# Altium PCB Holiday r2.PcbDoc (part 3 of 3)
Units mil, origin at the board's own origin, x right, y up, seen from the top; angles counter-clockwise.
Board outline 2637.8 x 2637.8 mil, 4 copper layers (Top Layer, Mid-Layer 1, InternalPlane1, Bottom Layer), stack 63.08 mil thick; 132 components, 142 nets, 636 pads, 407 vias.
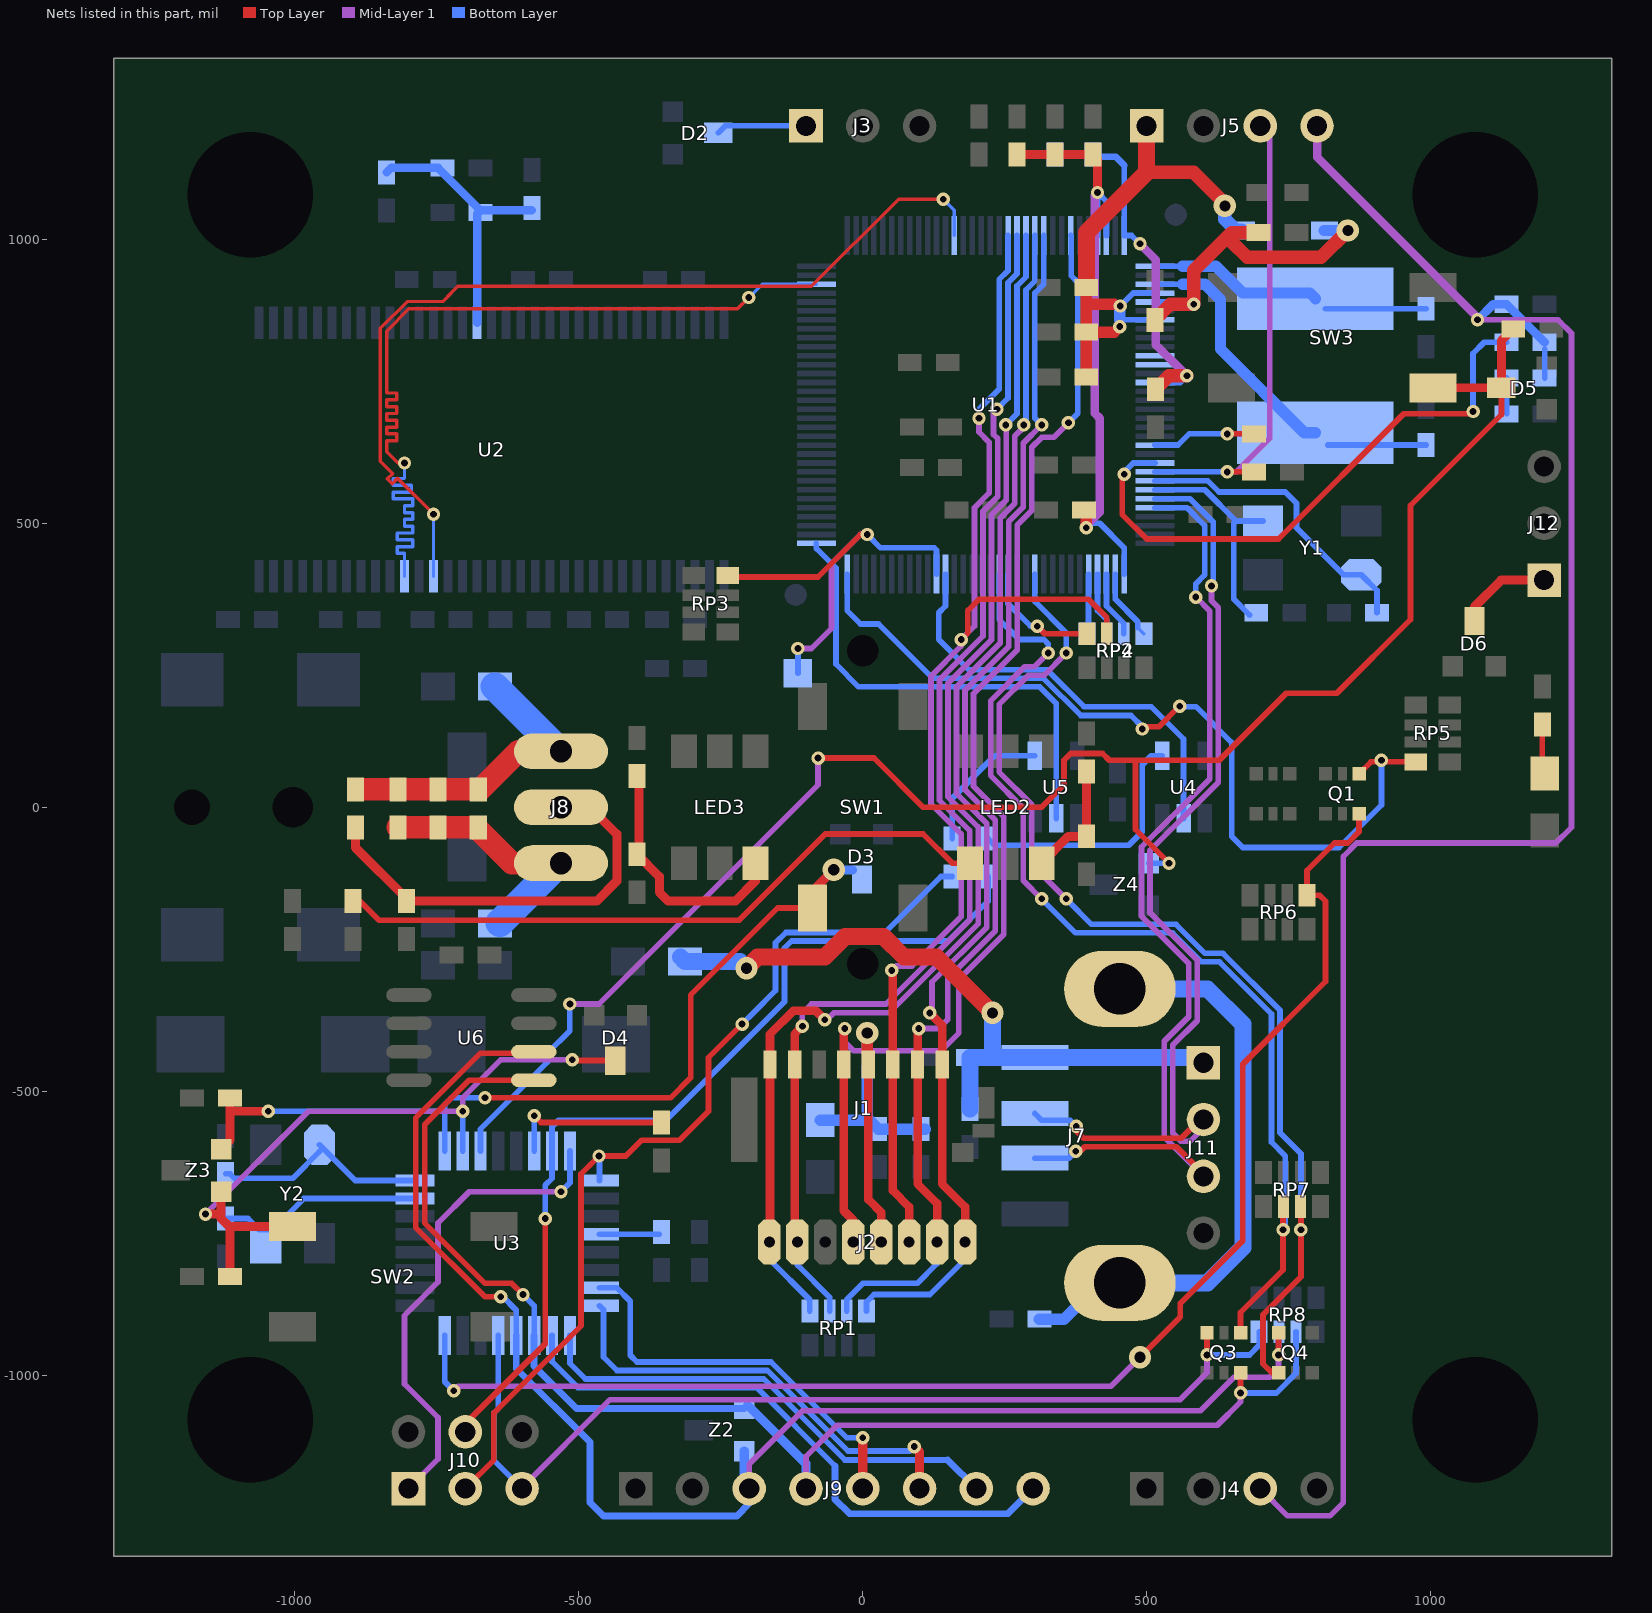
[diagram p5: the nets of this part, all layers, seen from the top]

## Via types
v1: diameter 23.62, hole 11.81, Top Layer to Bottom Layer, tented both sides, 373 vias
v2: diameter 39.37, hole 19.68, Top Layer to Bottom Layer, tented both sides, 33 vias
v3: diameter 35.43, hole 19.68, Top Layer to Bottom Layer, tented both sides, 1 vias

## Nets (pads, with @x,y where several pads share a name; then routed paths per layer and width w, separated by ;. In a path a pad name is that pad's centre, name@x,y a point inside that pad or via, vN(x,y) a via of type N, cw(c..) or ccw(c..) an arc to the next point about the centre after c; other vN are vias at no path point) (continued)
LCD_D00: RP2.4.1 U1.2 | length 125.6
  Bottom Layer w6: RP2.4.1@484.25,316.22 RP2.4.1@494.88,305.59
  Bottom Layer w10: U1.2@444.88,410.43 444.88,366.14 484.25,326.77 RP2.4.1@484.25,316.22
LCD_D01: RP2.3.1 U1.3 | length 117.6
  Bottom Layer w10: U1.3@429.13,410.43 429.13,354.33 459.88,323.58 RP2.3.1@459.88,305.59
LCD_D02: RP2.2.1 U1.4 | length 111.7
  Bottom Layer w10: U1.4@413.39,410.43 413.39,346.46 429.88,329.96 RP2.2.1@429.88,305.59
LCD_D03: RP2.1.1 U1.5 | length 106
  Bottom Layer w6: RP2.1.1@394.88,305.59 RP2.1.1@397.64,308.35
  Bottom Layer w10: RP2.1.1@397.64,308.35 U1.5@397.64,410.43
LCD_RS: RP4.4.1 U1.14 | length 213
  Top Layer w10: v1(307.09,318.9) 320.39,305.59 RP4.4.1@394.88,305.59
  Bottom Layer w10: U1.14@255.91,410.43 255.91,358.27 295.28,318.9 v1(307.09,318.9)
LRADC0: U1.108
LRADC1: U1.107
MISO: RP3.4.1 TP1.1 U1.22 | length 768.9
  Top Layer w10: RP3.4.1@-237.72,408.27 -234.96,405.51 -78.74,405.51 -3.94,480.32 v1(7.87,480.32)
  Mid-Layer 1 w10: v1(-114.17,279.53) -90.55,279.53 -55.12,314.96 -55.12,429.13 -3.94,480.32 v1(7.87,480.32)
  Bottom Layer w10: TP1.1@-114.17,236.22 v1(-114.17,279.53) ; v1(7.87,480.32) 31.5,456.69 125.98,456.69 129.92,452.76 U1.22@129.92,410.43
MISO_5V: J10.1 U3.16 | length 866.1
  Mid-Layer 1 w10: J10.1@-800,-1200 -748.03,-1148.03 -748.03,-1074.8 -807.09,-1015.75 -807.09,-895.28 -748.03,-836.22 -748.03,-732.28 -692.91,-677.17 v1(-531.5,-677.17)
  Bottom Layer w10: J10.1@-800,-1200 J10.1@-800,-1189.76 ; v1(-531.5,-677.17) -515.75,-661.42 U3.16@-515.75,-605.32
MOSI: U1.21 U4.2 | length 763.5
  Bottom Layer w10: U1.21@145.67,410.43 145.67,354.33 133.86,342.52 133.86,295.28 145.67,283.46 187.17,241.97 324.96,241.97 389.76,177.17 507.87,177.17 564.96,120.08 U4.2@564.96,-19.69
MOSI_5V: J10.4 R13.1 U3.15 | length 1631.4
  Top Layer w10: J10.4@-700,-1100 -700,-1085.83 -559.06,-944.88 v1(-559.06,-724.41)
  Bottom Layer w10: v1(-559.06,-724.41) -559.06,-665.35 -547.24,-653.54 U3.15@-547.24,-605.32 -547.24,-562.99 -535.43,-551.18 -346.46,-551.18 -137.8,-342.52 -137.8,-248.03 -125.24,-235.47 150.35,-235.47 220.47,-165.35 R13.1@220.47,-122.05
NetC21_1: C21.1 L1.1 U1.97 | length 473.5
  Bottom Layer w10: U1.97@524.61,952.76 562.99,952.76 ; L1.1@814.96,877.95 C21.1@992.13,877.95
  Bottom Layer w20: 562.99,952.76 622.05,952.76 669.29,905.51 787.4,905.51 L1.1@797.24,895.67
NetC30_1: C30.1 L1.2 U1.99 | length 611
  Bottom Layer w10: U1.99@518.7,921.26 562.99,921.26 ; L1.2@818.9,637.8 C30.1@992.13,637.8
  Bottom Layer w20: 562.99,921.26 602.36,921.26 629.92,893.7 629.92,807.09 777.56,659.45 L1.2@797.24,659.45
NetC33_1: C33.1 U1.122 Y1.3 | length 391.2
  Bottom Layer w10: U1.122@514.76,559.06 602.36,559.06 657.48,503.94 ; C33.1@681.1,338.58 653.54,366.14 653.54,381.89 653.54,500 657.48,503.94 ; Y1.3@704.73,503.94 657.48,503.94
NetC34_2: C34.2 C36.1 R4.1 R5.1 U2.49 | length 490.4
  Bottom Layer w15: R4.1@-838.58,1118.11 -830.71,1125.98 -748.03,1125.98 C34.2@-673.25,1051.2 ; U2.49@-679.13,853.35 -679.13,1045.31 C34.2@-673.25,1051.2 ; C36.1@-582.68,1051.2 C34.2@-673.25,1051.2
NetC35_1: C35.1 U1.121 Y1.1 | length 535.4
  Bottom Layer w10: U1.121@514.76,574.8 607.83,574.8 627.51,555.12 744.09,555.12 763.78,535.43 763.78,492.13 846.46,409.45 Y1.1@877.95,409.45 905.51,381.89 C35.1@905.51,342.52
NetC37_1: C37.1 U1.117 | length 182.4
  Top Layer w10: v1(641.73,657.48) C37.1@688.98,657.48
  Bottom Layer w10: U1.117@514.76,637.8 555.12,637.8 574.8,657.48 v1(641.73,657.48)
NetC41_1: C41.1 R6.1 | length 63
  Bottom Layer w10: C41.1@1133.86,692.91 R6.1@1133.86,755.91
NetC42_1: C42.1 U3.8 Y2.1 | length 382.6
  Bottom Layer w10: C42.1@-1122.05,-645.67 -1114.17,-645.67 -1106.3,-653.54 -1003.94,-653.54 Y2.1@-956.69,-606.3 ; Y2.1@-956.69,-594.49 -893.7,-657.48 U3.8@-788.39,-657.48
NetC43_1: C43.1 U3.7 Y2.3 | length 364.6
  Bottom Layer w10: C43.1@-1122.05,-724.41 -1082.68,-724.41 -1062.99,-744.09 -1039.37,-744.09 -984.25,-688.98 U3.7@-788.39,-688.98
NetC44_1: C44.1 U3.20 | length 105.3
  Bottom Layer w10: U3.20@-463.58,-751.97 C44.1@-358.27,-751.97
NetC45_1: C45.1 C46.1 J7.1 J11.1 L3.2 | length 1216.4
  Top Layer w30: v2(-204.72,-283.46) -185.04,-263.78 -66.93,-263.78 -31.18,-228.03 36.8,-228.03 72.55,-263.78 129.92,-263.78 v2(228.35,-362.2)
  Bottom Layer w30: L3.2@-321.26,-263.78 L3.2@-313.39,-271.65 -216.53,-271.65 v2(-204.72,-283.46) ; C45.1@188.98,-531.5 C46.1@188.98,-444.88 ; C46.1@188.98,-440.95 228.35,-440.95 ; v2(228.35,-362.2) 228.35,-440.95 ; J11.1@600,-450 590.95,-440.95 J7.1@303.15,-440.95 228.35,-440.95
NetC47_1: C47.1 C52.2 C53.2 C54.1 J8.3 L7.2 | length 545.9
  Top Layer w40: C54.1@-885.83,31.48 -692.93,31.48 ; -692.91,31.5 C47.1@-677.17,31.5 -673.23,31.5 -606.3,98.42 J8.3@-531.5,98.42
  Bottom Layer w50: L7.2@-648.03,212.6 -533.86,98.42 J8.3@-531.5,98.42
NetC47_2: C47.2 C52.1 C53.1 J8.1 L5.2 | length 464.5
  Top Layer w40: C53.1@-818.9,-35.42 -681.12,-35.42 -618.11,-98.43 J8.1@-531.5,-98.43
  Bottom Layer w50: L5.2@-638.98,-203.54 -533.86,-98.43 J8.1@-531.5,-98.43
NetC49_2: C49.2 LED3.3 R10.1 | length 444.6
  Top Layer w16: C49.2@-397.64,-82.69 -358.27,-122.06 -358.27,-149.61 -342.52,-165.35 -224.41,-165.35 -188.98,-129.92 LED3.3@-188.98,-98.43 ; R10.1@-397.64,55.12 -393.72,51.2 C49.2@-393.72,-82.69
NetC54_2: C54.2 J8.2 L6.2 | length 752.9
  Top Layer w16: C54.2@-893.7,-35.43 -893.7,-70.86 -803.15,-161.42 L6.2@-803.15,-165.37 -468.52,-165.37 -433.07,-129.92 -433.07,-47.24 -480.32,0 J8.2@-531.5,0
NetC55_2: C55.2 LED2.3 R11.1 | length 212.5
  Top Layer w16: LED2.3@314.96,-98.43 362.19,-51.2 C55.2@393.7,-51.2 R11.1@393.7,62.99
NetD2_2: D2.3 J3.1 | length 184.2
  Top Layer w10: J3.1@-100,1200 J3.1@-75.59,1200
  Bottom Layer w10: D2.3@-254.64,1187.61 -242.25,1200 J3.1@-100,1200
NetD6_2: D6.3 J12.1 | length 167
  Top Layer w16: D6.3@1077.37,328.03 1077.37,352.96 1124.41,400 J12.1@1200,400
NetJ7_G1: J7.G1 J7.G2 L4.2 | length 1046.4
  Bottom Layer w20: L4.2@311.01,-901.57 354.33,-901.57 418.31,-837.6 J7.G2@452.76,-837.6
  Bottom Layer w30: J7.G2@452.76,-837.6 607.28,-837.6 669.29,-775.59 669.29,-381.89 607.28,-319.88 J7.G1@452.76,-319.88
NetJ9_5: J9.5 U3.23 | length 718.3
  Top Layer w15.98: J9.5@0,-1200 v1(0,-1110.24)
  Bottom Layer w10: U3.23@-463.58,-846.46 -433.07,-846.46 -409.45,-870.08 -409.45,-965.12 -397.64,-976.93 -161.75,-976.93 -28.44,-1110.24 v1(0,-1110.24)
NetJ9_6: J9.6 U3.24 | length 790.2
  Top Layer w15.98: v1(90.55,-1125.98) 100,-1135.43 J9.6@100,-1200
  Bottom Layer w10: U3.24@-463.58,-877.95 -456.69,-884.84 -456.69,-968.31 -433.07,-991.93 -167.96,-991.93 -26.03,-1133.86 82.68,-1133.86 v1(90.55,-1125.98)
NetJ9_7: J9.7 U3.25 | length 856.4
  Bottom Layer w10: U3.25@-515.75,-930.12 -515.75,-979.37 -488.19,-1006.93 -174.17,-1006.93 -31.5,-1149.61 149.61,-1149.61
  Bottom Layer w12: 149.61,-1149.61 J9.7@200,-1200
NetJ9_8: J9.8 U3.26 | length 1057.3
  Bottom Layer w10: U3.26@-547.24,-930.12 -547.24,-976.38 -501.69,-1021.93 -186.73,-1021.93 -48.77,-1159.89
  Bottom Layer w12: -23.62,-1244.09 255.91,-1244.09 J9.8@300,-1200
  Bottom Layer w12.01: -48.77,-1159.89 -48.77,-1218.94 -23.62,-1244.09
NetLED1_A: LED1.A R1.1 | length 88.2
  Top Layer w10: R1.1@1196.85,145.67 1196.85,62.99 LED1.A@1200.79,59.05
NetLED2_1: LED2.1 R15.2 | length 1184.7
  Top Layer w10: R15.2@-897.64,-165.35 -885.83,-165.35 -852.08,-199.1 -217.79,-199.1 -65.93,-47.24 106.3,-47.24 157.48,-98.43 LED2.1@188.98,-98.43
NetR8_1: R8.1 U1.119 | length 1045.8
  Top Layer w10: v1@456.69,586.61 456.69,515.75 500,472.44 732.28,472.44 952.76,692.91 v1@1074.8,692.91
  Mid-Layer 1 w10: v1@456.69,586.61 v1(460.63,586.61) ; v1@1074.8,692.91 v1(1074.8,696.85)
  Bottom Layer w10: v1(460.63,586.61) 456.69,586.61 476.38,606.3 U1.119@514.76,606.3 ; v1(1074.8,696.85) 1074.8,799.21 1094.49,818.9 R8.1@1133.86,818.9
NetR12_2: R12.2 U3.14 | length 291.3
  Top Layer w10: v1(-578.74,-543.31) -566.91,-555.14 R12.2@-354.33,-555.14
  Bottom Layer w10: U3.14@-578.74,-605.32 v1(-578.74,-543.31)
NetR13_2: R13.2 U4.4 | length 446.4
  Bottom Layer w10: R13.2@220.47,-55.14 232.27,-66.93 468.5,-66.93 492.13,-43.31 492.13,74.8 507.87,90.55 U4.4@527.56,90.55
NetR14_2: R14.2 U5.4 | length 247.5
  Bottom Layer w10: R14.2@157.48,-55.14 157.48,15.75 232.28,90.55 U5.4@303.15,90.55
PB1_5V: C58.2 D3.3 SW1.1 U3.9 Z3.2 | length 1548.7
  Top Layer w10: v1(-665.35,-511.81) -338.58,-511.81 -303.15,-476.38 -303.15,-330.71 -150,-177.56 SW1.1@-88.19,-177.56
  Top Layer w15.75: Z3.2@-1129.92,-602.16 -1114.19,-586.43 -1114.19,-535.43 ; C58.2@-1114.19,-511.81 -1114.19,-535.43 ; v1(-1047.24,-535.43) -1114.19,-535.43
  Top Layer w16: SW1.1@-88.19,-177.56 -88.19,-147.24 v2(-51.18,-110.24)
  Bottom Layer w10: v1(-1047.24,-535.43) -736.22,-535.43 ; U3.9@-736.22,-605.32 -736.22,-535.43 ; v1(-665.35,-511.81) -724.41,-511.81 -736.22,-523.62 -736.22,-535.43
  Bottom Layer w16: v2(-51.18,-110.24) D3.3@-18.38,-110.24
PB2_5V: C59.2 D4.3 SW2.1 U3.10 Z3.1 | length 1212.1
  Top Layer w10: v1(-511.81,-444.88) -510.55,-446.14 D4.3@-435.64,-446.14
  Top Layer w15.75: v1(-1157.48,-716.54) -1129.92,-716.54
  Top Layer w15.98: Z3.1@-1129.92,-677.16 -1129.92,-716.54 -1129.92,-724.41 -1114.19,-740.14 C59.2@-1114.19,-826.77 ; -1114.19,-738.58 SW2.1@-1004.33,-738.58
  Mid-Layer 1 w10: v1(-1157.48,-716.54) -976.38,-535.43 v1(-704.72,-535.43) -704.72,-511.81 -637.79,-444.88 v1(-511.81,-444.88)
  Bottom Layer w10: U3.10@-704.73,-605.32 v1(-704.72,-535.43)
PB3_5V: C60.2 D5.3 SW3.1 U3.11 Z4.1 | length 3167.8
  Top Layer w10: v1(-78.74,86.61) 19.68,86.61 106.3,0 314.96,0 354.33,39.37 354.33,82.68 366.14,94.49 422.24,94.49 434.06,82.68 480.32,82.68 ; v1(539.37,-98.43) 480.32,-39.37 480.32,82.68 ; SW3.1@1004.33,738.58 SW3.1@1004.54,738.79 ; D5.3@1124.73,738.79 1124.73,691.65 964.57,531.5 964.57,330.71 834.65,200.79 745.79,200.79 627.68,82.68 480.32,82.68
  Top Layer w15.75: SW3.1@1004.54,738.79 D5.3@1124.73,738.79 1124.73,821.56 C60.2@1145.69,842.52
  Mid-Layer 1 w10: v1(-515.75,-346.46) -464.57,-346.46 -78.74,39.37 v1(-78.74,86.61)
  Bottom Layer w10: U3.11@-673.23,-605.32 -673.23,-566.93 -555.12,-448.82 -555.12,-433.07 -515.75,-393.7 v1(-515.75,-346.46) ; Z4.1@503.94,-98.43 v1(539.37,-98.43)
PSWITCH: J4.3 J5.4 R6.2 R7.2 R8.2 | length 3448
  Top Layer w15: J5.4@800,1180.31 J5.4@800,1200
  Mid-Layer 1 w10: J4.3@700,-1200 748.03,-1248.03 822.83,-1248.03 846.46,-1224.41 846.46,-86.61 870.08,-62.99 1220.47,-62.99 1248.03,-35.43 1248.03,834.65 1224.41,858.27 v1@1086.61,858.27
  Mid-Layer 1 w15: J5.4@800,1180.31 800,1144.88 1082.68,862.2 v1(1082.68,858.27) ; v1@1084.65,860.24 v1@1086.61,858.27
  Bottom Layer w10: R6.2@1200.77,755.91 R8.2@1200.77,807.1
  Bottom Layer w15: v1(1082.68,858.27) 1110.2,885.79 R7.2@1133.88,885.83 R8.2@1200.77,818.9
RAS_N: U1.62 U2.23 | length 1660.8
  Top Layer w6: v1(-807.09,606.3) -818.9,606.3 -838.58,625.98 -838.58,645.46 -820.38,645.46 -820.38,657.46 -838.58,657.46 -838.58,669.46 -820.38,669.46 -820.38,681.46 -838.58,681.46 -838.58,693.46 -820.38,693.46 -820.38,705.46 -838.58,705.46 -838.58,717.46 -820.38,717.46 -820.38,729.46 -838.58,729.46 -838.58,838.58 -799.21,877.95 -713.06,877.95 -712.93,877.83 -220.6,877.83 v1(-200.79,897.64)
  Bottom Layer w6: U2.23@-807.09,406.5 -807.09,446.94 -819.71,446.94 -819.71,458.94 -792.49,458.94 -792.49,470.94 -819.71,470.94 -819.71,482.94 -792.49,482.94 -792.49,494.94 -807.09,494.94 -807.09,506.94 -792.49,506.94 -792.49,518.94 -807.09,518.94 -807.09,530.94 -792.49,530.94 -792.49,542.94 -827.09,542.94 -827.09,554.94 -794.76,554.94 -794.76,566.94 -827.09,566.94 -827.09,578.94 -807.09,578.94 v1(-807.09,606.3) ; v1(-200.79,897.64) -177.17,921.26 U1.62@-81.69,921.26
RESET_N: J10.5 Q3.3 RP8.4.1 U3.29 | length 1778.5
  Top Layer w10: v1(606.3,-964.57) Q3.3@606.3,-925.2
  Mid-Layer 1 w10: J10.5@-600.79,-1199.21 -444.88,-1043.31 559.06,-1043.31 606.3,-996.06 v1(606.3,-964.57)
  Bottom Layer w10: U3.29@-641.73,-930.12 -641.73,-1059.06 -649.61,-1066.93 -649.61,-1150.39 J10.5@-600,-1200 ; v1(606.3,-964.57) 681.1,-964.57 698.03,-947.64 RP8.4.1@698.03,-923.7
SCK: U1.33 U5.2 | length 846
  Bottom Layer w10: U1.33@-81.69,464.57 -81.69,455.71 -47.24,421.26 -47.24,251.97 -7.24,211.97 311.65,211.97 340.55,183.07 U5.2@340.55,-19.69
SCK_5V: J10.3 R14.1 U3.17 | length 1656.2
  Top Layer w10: J10.3@-700,-1200 -649.61,-1149.61 -649.61,-1066.93 -496.06,-913.39 -496.06,-645.67 -480.31,-629.92 v1(-464.57,-614.17) -417.32,-614.17 -389.76,-586.61 -322.83,-586.61 -271.65,-535.43 -271.65,-440.94 v1(-212.6,-381.89)
  Bottom Layer w10: U3.17@-463.58,-657.48 v1@-463.58,-615.16 ; v1(-212.6,-381.89) -192.91,-362.2 -153.54,-322.83 -153.54,-238.63 -135.39,-220.47 39.37,-220.47 137.8,-122.05 R14.1@157.48,-122.05
SCL: Q4.4 RP7.3.1 U1.11 | length 1906.3
  Top Layer w10: Q4.4@732.28,-996.06 720.47,-996.06 704.72,-980.31 704.72,-893.7 771.65,-826.77 v1(771.65,-744.09) RP7.3.1@771.65,-703.98
  Mid-Layer 1 w10: v1(358.27,-161.42) 297.72,-100.87 297.72,4.55 240.16,62.11 240.16,181.1 291.32,232.27 318.88,232.27 v1(358.27,271.65)
  Bottom Layer w10: U1.11@303.15,410.43 303.15,362.21 358.27,307.09 v1(358.27,271.65) ; v1(358.27,-161.42) 403.07,-206.22 551.8,-206.22 602.98,-257.4 634.47,-257.4 734.72,-357.65 734.72,-573.31 771.65,-610.24 v1(771.65,-744.09)
SCL_5V: J9.3 Q4.3 RP8.3.1 U3.28 U6.6 Z2.2 | length 2623.8
  Top Layer w10: v1(-637.8,-862.2) -665.35,-862.2 -787.4,-740.16 -787.4,-547.24 -673.23,-433.07 -581.57,-433.07 U6.6@-579.21,-430.71 ; v1(732.28,-964.57) Q4.3@732.28,-925.2
  Mid-Layer 1 w10: J9.3@-200,-1200 -200,-1156.69 -106.3,-1062.99 594.49,-1062.99 653.54,-1003.94 716.54,-1003.94 732.28,-988.19 v1(732.28,-964.57)
  Bottom Layer w10: v1(-637.8,-862.2) -633.86,-862.2 -610.24,-885.83 U3.28@-610.24,-930.12 ; v1(732.28,-964.57) 733.03,-963.82 RP8.3.1@733.03,-923.7
  Bottom Layer w12: U3.28@-610.24,-930.12 -610.24,-988.19 -480.31,-1118.11 ; -456.69,-1248.03 -221.65,-1248.03 -200,-1226.38 J9.3@-200,-1200
  Bottom Layer w12.01: -480.31,-1118.11 -480.31,-1224.41 -456.69,-1248.03
  Bottom Layer w15.98: Z2.2@-208.66,-1134.05 -208.66,-1191.34 J9.3@-200,-1200
SD_VCC: C39.1 C40.1 J1.4 J2.4 L2.1 | length 725
  Top Layer w15: J1.4@9.84,-452.76 9.84,-690.94 32.48,-713.58 J2.4@32.48,-765.75
  Top Layer w20: v2(7.87,-397.64) 7.87,-450.79 J1.4@9.84,-452.76
  Bottom Layer w20: L2.1@-74.8,-551.18 11.81,-551.18 ; v2(7.87,-397.64) 7.87,-547.24 11.81,-551.18 ; C40.1@110.24,-566.93 C40.1@102.36,-566.93 C39.1@27.56,-566.93 11.81,-551.18
SDA: Q3.1 RP7.2.1 U1.15 | length 1856.3
  Top Layer w10: Q3.1@665.36,-925.2 665.36,-889.76 740.16,-814.96 v1(740.16,-744.09) 740.16,-703.98 RP7.2.1@740.91,-703.23
  Mid-Layer 1 w10: v1(314.96,-161.42) 282.72,-129.17 282.72,-1.66 225.16,55.9 225.16,187.32 285.11,247.27 302.39,247.27 v1(326.77,271.65)
  Bottom Layer w10: U1.15@240.16,410.43 240.16,330.71 275.59,295.28 318.9,295.28 326.77,287.4 v1(326.77,271.65) ; v1(314.96,-161.42) 374.76,-221.22 545.58,-221.22 596.76,-272.4 628.26,-272.4 719.72,-363.87 719.72,-589.8 744.09,-614.17 744.09,-740.16 v1(740.16,-744.09)
SDA_5V: J9.4 Q3.6 RP8.2.1 U3.27 U6.5 Z2.1 | length 2446.3
  Top Layer w10: v1(-598.43,-858.27) -618.11,-838.58 -665.35,-838.58 -771.65,-732.28 -771.65,-559.06 -693.31,-480.71 U6.5@-579.21,-480.71 ; v1(665.35,-1031.5) Q3.6@665.36,-996.06
  Mid-Layer 1 w10: J9.4@-100,-1200 -100,-1143.31 -45.12,-1088.43 624.17,-1088.43 665.35,-1047.24 v1(665.35,-1031.5)
  Bottom Layer w10: v1(-598.43,-858.27) -578.74,-877.95 U3.27@-578.74,-930.12 ; v1(665.35,-1031.5) 728.35,-1031.5 763.03,-996.81 RP8.2.1@763.03,-923.7
  Bottom Layer w12: U3.27@-578.74,-930.12 -578.74,-984.25 -503.94,-1059.05 Z2.1@-208.66,-1059.05
  Bottom Layer w15.98: Z2.1@-202.76,-1053.15 -100,-1155.91 J9.4@-100,-1200
SS: Q1.1 RP5.4.1 U1.32 | length 1528.5
  Top Layer w10: v1(492.12,137.8) 496.06,141.73 521.73,141.73 v1(558,178) ; Q1.1@874.02,59.06 894.88,79.92 RP5.4.1@973.94,79.92
  Bottom Layer w10: U1.32@-27.56,410.43 -27.56,346.46 -3.94,322.83 27.56,322.83 123.43,226.97 318.55,226.97 384.1,161.42 472.44,161.42 492.12,141.73 v1(492.12,137.8) ; v1(558,178) 558.83,177.17 586.61,177.17 649.61,114.17 649.61,-51.18 669.29,-70.87 838.58,-70.87 913.39,3.94 v1(913.39,82.68)
SS_5V: Q1.6 RP6.1.1 U3.32 | length 2507.6
  Top Layer w10: v2(488.19,-968.5) 559.06,-897.64 559.06,-873.72 669.29,-763.48 669.29,-452.76 814.96,-307.09 814.96,-165.35 804.65,-155.04 RP6.1.1@782.28,-155.04 782.28,-111.42 830.71,-62.99 854.33,-62.99 874.02,-43.31 Q1.6@874.02,-11.81
  Mid-Layer 1 w10: v1(-720.47,-1027.56) -712.6,-1019.68 437.01,-1019.68 v2(488.19,-968.5)
  Bottom Layer w10: U3.32@-736.22,-930.12 -736.22,-1011.81 v1(-720.47,-1027.56)
SSP1_CMD: J1.3 J2.3 RP4.3.1 U1.83 | length 2295.7
  Top Layer w10: v1(173.23,295.28) 185.04,307.09 185.04,346.46 204.72,366.14 397.64,366.14 429.88,333.9 RP4.3.1@429.88,305.59
  Top Layer w15: v1(51.18,-287.4) 53.15,-289.37 J1.3@53.15,-452.76 53.15,-675.2 81.69,-703.74 J2.3@81.69,-765.75
  Mid-Layer 1 w10: v1(51.18,-287.4) 59.06,-279.53 86.61,-279.53 173.23,-192.91 173.23,-47.24 120.16,5.83 120.16,230.81 173.23,283.88 v1(173.23,295.28) 196.85,318.9 196.85,527.56 222.6,553.31 222.6,642.89 204.72,660.77 v1(204.72,685.04)
  Bottom Layer w10: v1(204.72,685.04) 204.72,700.79 240.16,736.22 240.16,929.13 255.91,944.88 U1.83@255.91,1006.89
SSP1_DAT0: J1.7 J2.7 RP1.2.1 U1.84 | length 2206.2
  Top Layer w10: v1(236.22,700.79) v1@236.22,704.72
  Top Layer w15: J2.7@-120.08,-760.82 J1.7@-120.08,-452.76 -120.08,-399.61 v1(-106.3,-385.83)
  Mid-Layer 1 w10: v1(-106.3,-385.83) -106.3,-362.2 -90.55,-346.46 40.9,-346.46 188.23,-199.13 188.23,-41.03 135.16,12.04 135.16,224.59 211.85,301.29 211.85,521.35 237.6,547.09 237.6,649.11 230.16,656.55 230.16,694.72 v1(236.22,700.79)
  Bottom Layer w10: J2.7@-115.16,-765.75 -115.16,-806.1 -58.31,-862.95 RP1.2.1@-58.31,-887.32 ; v1(236.22,700.79) 255.91,720.47 255.91,923.67 271.65,939.42 U1.84@271.65,1006.89
SSP1_DAT1: J1.8 J2.8 RP1.1.1 U1.85 | length 2269.3
  Top Layer w15: J2.8@-164.37,-765.75 -163.39,-764.76 J1.8@-163.39,-452.76 -163.39,-399.61 -122.05,-358.27 -82.68,-358.27 v1(-66.93,-374.02)
  Mid-Layer 1 w10: v1(-66.93,-374.02) -62.99,-374.02 -51.18,-362.2 46.36,-362.2 203.23,-205.34 203.23,-34.82 150.16,18.25 150.16,218.38 226.85,295.07 226.85,515.13 252.6,540.88 252.6,672.6 v1(251.97,673.23)
  Bottom Layer w10: J2.8@-164.37,-765.75 -164.37,-796.26 -93.31,-867.32 RP1.1.1@-93.31,-887.32 ; v1(251.97,673.23) 271.65,692.91 271.65,918.2 287.4,933.95 U1.85@287.4,1006.89
SSP1_DAT2: J1.1 J2.1 RP1.4.1 U1.86 | length 2172.8
  Top Layer w15: v1(118.11,-362.2) 139.76,-383.86 J1.1@139.76,-452.76 139.76,-663.39 180.12,-703.74 J2.1@180.12,-765.75
  Mid-Layer 1 w10: v1(118.11,-362.2) 122.05,-358.27 122.05,-307.73 218.23,-211.55 218.23,-28.6 165.16,24.47 165.16,212.17 241.85,288.86 241.85,508.92 267.72,534.79 267.72,653.54 283.46,669.29 v1(283.46,673.23)
  Bottom Layer w10: RP1.4.1@6.69,-887.32 6.69,-871.26 19.68,-858.27 118.11,-858.27 180.12,-796.26 J2.1@180.12,-765.75 ; v1@279.53,673.23 v1(283.46,673.23) ; v1@281.5,675.19 287.4,681.1 287.4,910.98 303.15,926.72 U1.86@303.15,1006.89
SSP1_DAT3: J1.2 J2.2 RP1.3.1 U1.87 | length 2194.4
  Top Layer w15: v1@96.46,-391.73 J1.2@96.46,-452.76 96.46,-663.38 130.9,-697.83 J2.2@130.9,-765.75
  Mid-Layer 1 w10: v1(98.43,-389.76) 133.86,-389.76 149.61,-374.02 149.61,-301.39 233.23,-217.77 233.23,-22.39 180.16,30.68 180.16,205.96 256.85,282.65 256.85,502.71 282.72,528.57 282.72,640.98 v1(314.96,673.23)
  Bottom Layer w10: RP1.3.1@-28.31,-887.32 -28.31,-866.89 0,-838.58 95.82,-838.58 130.9,-803.49 J2.2@130.9,-765.75 ; v1(314.96,673.23) 303.15,685.04 303.15,905.51 318.9,921.26 U1.87@318.9,1006.89
SSP1_SCK: J1.5 J2.5 U1.90 | length 2142.1
  Top Layer w15: v1(-31.5,-389.76) -33.46,-391.73 J1.5@-33.46,-452.76 -33.46,-710.63 J2.5@-16.73,-727.36
  Mid-Layer 1 w10: v1(-31.5,-389.76) -31.5,-413.39 -15.75,-429.13 137.8,-429.13 169.29,-397.64 169.29,-302.92 248.23,-223.98 248.23,-16.18 195.16,36.89 195.16,199.74 271.85,276.43 271.85,496.49 297.72,522.36 297.72,633.86 315.28,651.42 336.46,651.42 v1(362.2,677.16)
  Bottom Layer w10: v1(362.2,677.16) 378.58,693.54 378.58,924.57 366.97,936.18 366.97,1006.06 U1.90@366.14,1006.89
USB_D_N: J7.2 J11.2 U1.123 | length 1732.8
  Top Layer w10: v1(376,-562) 376,-570 389,-583 561,-583 J11.2@592.5,-551.5
  Mid-Layer 1 w10: J11.2@600,-550 600,-565 577,-588 560,-588 546,-574 546,-419 589,-376 589,-268.79 506,-185.79 506,-76.21 626,43.79 626,351.91 614.17,363.73 v1(614.17,389.76)
  Bottom Layer w10: J7.2@303.15,-539.37 314.96,-551.18 365.18,-551.18 v1(376,-562) ; U1.123@514.76,543.31 576.33,543.31 617,502.64 617,392.59 v1(614.17,389.76) ; J11.2@592.5,-551.5 600,-559 J11.2@600,-550
USB_D_P: J7.3 J11.3 U1.124 | length 1731.4
  Top Layer w10: v1(375,-606) 383,-606 391,-598 552.58,-598 585.58,-631 J11.3@600,-631
  Mid-Layer 1 w10: v1(586.61,370.08) 611,345.69 611,50 491,-70 491,-192 574,-275 574,-369 531,-412 531,-581 J11.3@600,-650
  Bottom Layer w10: J7.3@303.15,-618.11 362.89,-618.11 v1(375,-606) ; U1.124@514.76,527.56 570.87,527.56 602,496.43 602,409 586.61,393.61 v1(586.61,370.08) ; J11.3@600,-650 J11.3@600,-631
VBAT: C18.1 C19.1 C20.1 D1.1 J5.1 U1.100 U1.103 | length 955.6
  Top Layer w20: C20.1@393.7,757.87 C19.1@393.7,836.61 ; C18.1@393.7,915.35 393.7,885.83 ; 442.91,836.61 C19.1@393.7,836.61 ; v1@442.91,885.83 393.7,885.83 ; C19.1@393.7,836.61 393.7,885.83
  Top Layer w24: 500,1118.11 582.68,1118.11 v2@631.89,1068.9
  Top Layer w30: C18.1@393.7,915.35 393.7,1011.81 500,1118.11 J5.1@500,1200
  Bottom Layer w10: 452.76,858.27 U1.103@514.76,858.27 ; v1@452.76,881.89 v1(453.58,882.72) 476.38,905.51 U1.100@514.76,905.51
  Bottom Layer w20: 452.76,858.27 v1@452.76,881.89
  Bottom Layer w24: v2(637.8,1059.06) 637.8,1035.43 657.48,1015.75 D1.1@667.32,1015.75
  other v1: 452.76,846.46
VDD4P2: C8.1 C9.1 D1.2 U1.101 | length 646.4
  Top Layer w20: 649.61,996.06 649.61,1011.81
  Top Layer w24: C8.1@511.81,856.3 541.34,885.83 v1(582.68,885.83) 582.68,944.88 649.61,1011.81 C9.1@696.85,1011.81 ; 649.61,996.06 677.17,968.5 807.09,968.5 v2(854.33,1015.75)
  Bottom Layer w10.01: U1.101@514.76,889.76 578.74,889.76 v1(582.68,885.83)
  Bottom Layer w20: D1.2@812.99,1015.75 v2(854.33,1015.75)
VDDA: C16.1 C17.1 C38.1 U1.96 U1.110 | length 677.7
  Top Layer w24: C38.1@515.75,736.22 539.37,759.84 v1(570.87,759.84)
  Mid-Layer 1 w15: v1(488.19,992.13) 515.75,964.57 515.75,814.96 v1(570.87,759.84)
  Bottom Layer w10: 460.63,1129.92 U1.96@460.63,1006.89 473.43,1006.89 v1(488.19,992.13) ; U1.110@514.76,748.03 559.06,748.03 v1(570.87,759.84)
  Bottom Layer w12: C17.1@405.51,1145.67 444.88,1145.67 460.63,1129.92
  Bottom Layer w16: C16.1@338.58,1149.61 C17.1@405.51,1149.61
VDDD: C1.1 C2.1 C11.1 C12.1 U1.1 U1.93 U1.94 | length 1140.1
  Top Layer w10: C1.1@389.76,523.62 C1.1@393.7,527.56 ; v1(393.7,492.13) v1@393.7,496.06
  Top Layer w16: C2.1@271.65,1149.61 C11.1@338.58,1149.61 C12.1@405.51,1149.61 413.39,1141.73 v1(413.39,1082.68)
  Top Layer w20: v1@393.7,496.06 C1.1@393.7,527.56
  Mid-Layer 1 w15: v1(393.7,492.13) 393.7,496.06 417.32,519.68 417.32,685.04 408.76,693.6 408.76,1078.05 v1(413.39,1082.68)
  Bottom Layer w10: v1(393.7,492.13) 393.7,496.06 397.64,500 417.32,500 460.63,456.69 U1.1@460.63,410.43 ; U1.93@413.39,1006.89 413.39,1051.18 v1(413.39,1082.68) ; v1@417.32,1078.74 429.13,1066.93 U1.94@429.13,1006.89
VDDXTAL: C31.1 J5.3 U1.120 | length 830.7
  Top Layer w10: v1(641.73,590.55) C31.1@688.98,590.55
  Mid-Layer 1 w10: v1(641.73,590.55) 657.48,590.55 716.54,649.61 716.54,1183.47 J5.3@700,1200
  Bottom Layer w10: U1.120@514.76,590.55 v1(641.73,590.55)
WE_N: U1.77 U2.21 | length 1660.8
  Top Layer w6: v1(-755.91,515.75) -819.34,579.18 -828.62,569.9 -837.1,578.39 -827.82,587.67 -849.58,609.43 -849.58,843.52 -802.53,890.57 -739.54,890.57 -724.54,905.58 -724.54,905.84 -712.93,917.45 -696.52,917.45 -696.39,917.32 -610.69,917.32 -610.57,917.45 -594.16,917.45 -594.03,917.32 -533.92,917.32 -533.8,917.45 -517.38,917.45 -517.26,917.32 -457.15,917.32 -457.02,917.45 -440.61,917.45 -440.49,917.32 -380.38,917.32 -380.25,917.45 -363.84,917.45 -363.71,917.32 -303.61,917.32 -303.48,917.45 -287.07,917.45 -286.94,917.32 -252.43,917.32 -252.3,917.45 -235.89,917.45 -235.76,917.32 -209.12,917.32 -208.99,917.45 -192.58,917.45 -192.46,917.32 -161.88,917.32 -161.75,917.45 -145.34,917.45 -145.21,917.32 -90.55,917.32 62.99,1070.87 v1(141.73,1070.87)
  Bottom Layer w6: U2.21@-755.91,406.5 v1(-755.91,515.75) ; v1(141.73,1070.87) 161.42,1051.18 U1.77@161.42,1006.89
pads on no net: D2.2 D3.2 D4.2 D5.2 D6.2 J1.G4 J6.0 LED2.4 LED3.1 LED3.4 SW1.2 SW2.2 SW3.2 U1.6 U1.7 U1.8 U1.9 U1.12 U1.16 U1.17 U1.104 U1.109 U1.111 U1.113 U1.114 U1.115 U1.116 U2.14 U2.17 U2.19 U2.25 U2.43 U2.50 U2.53 U3.13 U3.19 U3.22 U4.1 U5.1
copper on no net:
  other v1: -885.83,-1181.1 -885.83,-1082.68 -1082.68,-393.7 -1181.1,-98.42 -1082.68,-98.42 -984.25,-98.42 -1181.1,590.55 -1082.68,688.98 -1181.1,885.83 -885.83,1181.1 885.83,1181.1

## Polygon pours and split planes (outlines as drawn)
GND on Bottom Layer "Bottom Layer-GND" (solid, remove dead copper, pour order 9): -1318.9,-1318.9 -1318.9,1318.9 1318.9,1318.9 1318.9,-1318.9
GND on Mid-Layer 1 "Mid Layer-GND" (solid, remove dead copper, pour order 7): -1318.9,-1318.9 -1318.9,1318.9 1318.9,1318.9 1318.9,-1318.9
GND on Top Layer "Top Layer-GND" (solid, remove dead copper, pour order 5): -1318.9,-1318.9 -1318.9,1318.9 1318.9,1318.9 1318.9,-1318.9
GND on InternalPlane1 (split plane): 1298.8,-122.05 909.45,-122.05 909.45,-1298.8 -1298.8,-1298.8 -1298.8,1298.8 1298.8,1298.8

## Keep-outs
Top Layer:
  rectangle: 909.45,-1318.9 1318.9,-122.05
Mid-Layer 1:
  rectangle: 909.45,-1318.9 1318.9,-122.05
Bottom Layer:
  circle w10: c551.18,1043.31 r54.84
  circle w10: c-118.11,374.02 r54.84
  rectangle: 909.45,-1318.9 1318.9,-122.05
Keep-Out Layer:
  the board outline again, w35.43

## Other copper
InternalPlane1 (plane layer: these items are gaps in the copper):
  rectangle: 909.45,-1318.9 1318.9,-122.05

## Silkscreen, mask and mechanical layers (free items; w line width, h text height)
Top Overlay:
  drawing of 1968 lines, arcs and shapes, not listed
  text "MooresCloud" at -984.25,649.61 h100
  text "Holiday r2" at -921.26,488.19 h100
  text "Kean - June 2013" at -1141.73,-314.96 h78.74 r90
  text "Hack Me!" at -220.47,-1102.36 h60
Bottom Overlay:
  drawing of 808 lines, arcs and shapes, not listed
Mechanical 1:
  lines w10: -1322.83,-1318.9 -1322.83,1318.9 1314.96,1318.9 1314.96,-1318.9 -1322.83,-1318.9
Mechanical 2:
  circle w10: c0,0 r236.22
  circle w10: c0,0 r342.52
  region: -1318.9,-1318.9 -1318.9,-925.2 -925.2,-1318.9
  region: 1318.9,-1318.9 925.2,-1318.9 1318.9,-925.2
  region: 1318.9,1318.9 1318.9,925.2 925.2,1318.9
  region: -1318.9,1318.9 -925.2,1318.9 -1318.9,925.2
  region: -1118.11,1236.22 -1039.37,1236.22 -1039.37,1118.11 -921.26,1118.11 -921.26,1039.37 -1039.37,1039.37 -1039.37,921.26 -1118.11,921.26 -1118.11,1039.37 -1236.22,1039.37 -1236.22,1118.11 -1118.11,1118.11
  region: -1118.11,-921.26 -1039.37,-921.26 -1039.37,-1039.37 -921.26,-1039.37 -921.26,-1118.11 -1039.37,-1118.11 -1039.37,-1236.22 -1118.11,-1236.22 -1118.11,-1118.11 -1236.22,-1118.11 -1236.22,-1039.37 -1118.11,-1039.37
  region: 1039.37,-921.26 1118.11,-921.26 1118.11,-1039.37 1236.22,-1039.37 1236.22,-1118.11 1118.11,-1118.11 1118.11,-1236.22 1039.37,-1236.22 1039.37,-1118.11 921.26,-1118.11 921.26,-1039.37 1039.37,-1039.37
  region: 1039.37,1236.22 1118.11,1236.22 1118.11,1118.11 1236.22,1118.11 1236.22,1039.37 1118.11,1039.37 1118.11,921.26 1039.37,921.26 1039.37,1039.37 921.26,1039.37 921.26,1118.11 1039.37,1118.11
  region: -590.55,748.03 -511.81,669.29 -669.29,511.81 -748.03,590.55
  region: 590.55,-748.03 511.81,-669.29 669.29,-511.81 748.03,-590.55
  region: -523.62,-492.13 -452.76,-566.93 -614.17,-728.35 -688.98,-657.48
  region: -590.55,-1318.9 590.55,-1318.9 381.89,-511.81 244.09,-511.81 244.09,-629.92 -244.09,-629.92 -244.09,-511.81 -381.89,-511.81
  region: 523.62,492.13 452.76,566.93 614.17,728.35 688.98,657.48
  text "Top Layer Component Keep Out Areas" at 1771.65,-1031.5 h39.37
  text "Top Layer Component Keep Out Areas" at 4295.28,-2295.28 h39.37
Mechanical 3:
  circle w10: c1078.74,1078.74 r173.23
  circle w10: c-1078.74,1078.74 r173.23
  circle w10: c-1078.74,-1078.74 r173.23
  circle w10: c1078.74,-1078.74 r173.23
  rectangle: -275.59,-314.96 275.59,-236.22
  rectangle: -275.59,236.22 275.59,314.96
  text "Bottom Layer Component Keep Out Areas" at 1771.65,-1110.24 h39.37
  text "Bottom Layer Component Keep Out Areas" at 4295.28,-2374.02 h39.37
Drill Drawing:
  lines w3.94: 1751.97,-1311.02 4045.28,-1311.02 ; 1751.97,-1232.28 4045.28,-1232.28 ; 1751.97,-887.8 4045.28,-887.8 ; 1751.97,-809.06 4045.28,-809.06 ; 1751.97,-730.32 4045.28,-730.32 ; 1751.97,-651.58 4045.28,-651.58 ; 1751.97,-572.84 4045.28,-572.84 ; 1751.97,-494.1 4045.28,-494.1 ; 1751.97,-415.35 4045.28,-415.35 ; 1751.97,-336.61 4045.28,-336.61 ; 2244.09,-1389.76 2244.09,-1143.7 ; 2244.09,-966.54 2244.09,-257.87 ; -1318.9,-1318.9 1318.9,-1318.9 1318.9,1318.9 -1318.9,1318.9 -1318.9,-1318.9 ; 1751.97,-1389.76 4045.28,-1389.76 4045.28,-1143.7 1751.97,-1143.7 1751.97,-1389.76 ; 1751.97,-966.54 1751.97,-257.87 4045.28,-257.87 4045.28,-966.54 1751.97,-966.54
  lines w5.91: 1792.28,1755.91 3959.68,1755.91 ; 1792.28,1866.73 3959.68,1866.73 ; 1732.28,1059.06 ccw(c1767.72,1059.06) 1767.72,1023.62 3984.25,1023.62 ccw(c3984.25,1059.06) 4019.68,1059.06 4019.68,1960.63 ccw(c3984.25,1960.63) 3984.25,1996.06 1767.72,1996.06 ccw(c1767.72,1960.63) 1732.28,1960.63 1732.28,1059.06
  text "Layer Stack Up Detail for: Holiday r1.PcbDoc" at 1792.28,1896.56 h47.24
  text "Layer" at 1792.28,1825.39 h25.59
  text "Gerber" at 2799.02,1825.39 h25.59
  text "Dielectric" at 3465.44,1825.39 h25.59
  text "Name" at 1792.28,1774.21 h25.59
  text "Document" at 2799.02,1774.21 h25.59
  text "Material" at 3465.44,1774.21 h25.59
  text "Top Solder Mask" at 1792.28,1702.3 h35.43
  text "(.GTS)" at 2799.02,1702.3 h35.43
  text "Solder Resist" at 3465.44,1702.3 h35.43
  text "Top Layer" at 1792.28,1601.01 h35.43
  text "(.GTL)" at 2799.02,1601.01 h35.43
  text "FR-4" at 3465.44,1550.36 h35.43
  text "Mid-Layer 1" at 1792.28,1499.71 h35.43
  text "(.G1)" at 2799.02,1499.71 h35.43
  text "FR-4" at 3465.44,1449.07 h35.43
  text "InternalPlane1" at 1792.28,1398.42 h35.43
  text "(.GP1)" at 2799.02,1398.42 h35.43
  text "FR-4" at 3465.44,1347.77 h35.43
  text "Bottom Layer" at 1792.28,1297.12 h35.43
  text "(.GBL)" at 2799.02,1297.12 h35.43
  text "Bottom Solder Mask" at 1792.28,1195.83 h35.43
  text "(.GBS)" at 2799.02,1195.83 h35.43
  text "Solder Resist" at 3465.44,1195.83 h35.43
  text ".legend" at 1801.18,-51.18 h39.37
  text "BOARD SIZE:" at 1771.65,-316.93 h39.37
  text "67.00mm x 67.00mm" at 2283.46,-316.93 h39.37
  text "LAYERS:" at 1771.65,-395.67 h39.37
  text "4" at 2283.46,-395.67 h39.37
  text "MATERIAL:" at 1771.65,-474.41 h39.37
  text "FR4 1.6mm" at 2283.46,-474.41 h39.37
  text "COPPER:" at 1771.65,-553.15 h39.37
  text "35um (after plating)" at 2283.46,-553.15 h39.37
  text "PTH PLATING:" at 1771.65,-631.89 h39.37
  text "20um (minimum)" at 2283.46,-631.89 h39.37
  text "FINISH:" at 1771.65,-710.63 h39.37
  text "ROHS ENIG or HAL ?" at 2283.46,-710.63 h39.37
  text "OVERLAY:" at 1771.65,-789.37 h39.37
  text "White, 2 sides" at 2283.46,-789.37 h39.37
  text "SOLDER MASK:" at 1771.65,-868.11 h39.37
  text "Green LPI, 2 sides" at 2283.46,-868.11 h39.37
  text "PROFILING:" at 1771.65,-946.85 h39.37
  text "V-Groove" at 2283.46,-946.85 h39.37
  text "FILE NAME:" at 1771.65,-1212.6 h39.37
  text ".Pcb_File_Name_No_Path" at 2283.46,-1212.6 h39.37
  text "LAYER:" at 1771.65,-1291.34 h39.37
  text ".Plot_File_Name" at 2283.46,-1291.34 h39.37
  text "PRINT DATE:" at 1771.65,-1370.08 h39.37
  text ".Print_Date" at 2283.46,-1370.08 h39.37

## Dimensions
-1318.9,-1318.9 to -1318.9,1318.9 on Drill Drawing
-1318.9,-1318.9 to 1318.9,-1318.9 on Drill Drawing